# EAGLE board Main_Backup (EAGLE 7.2.0)
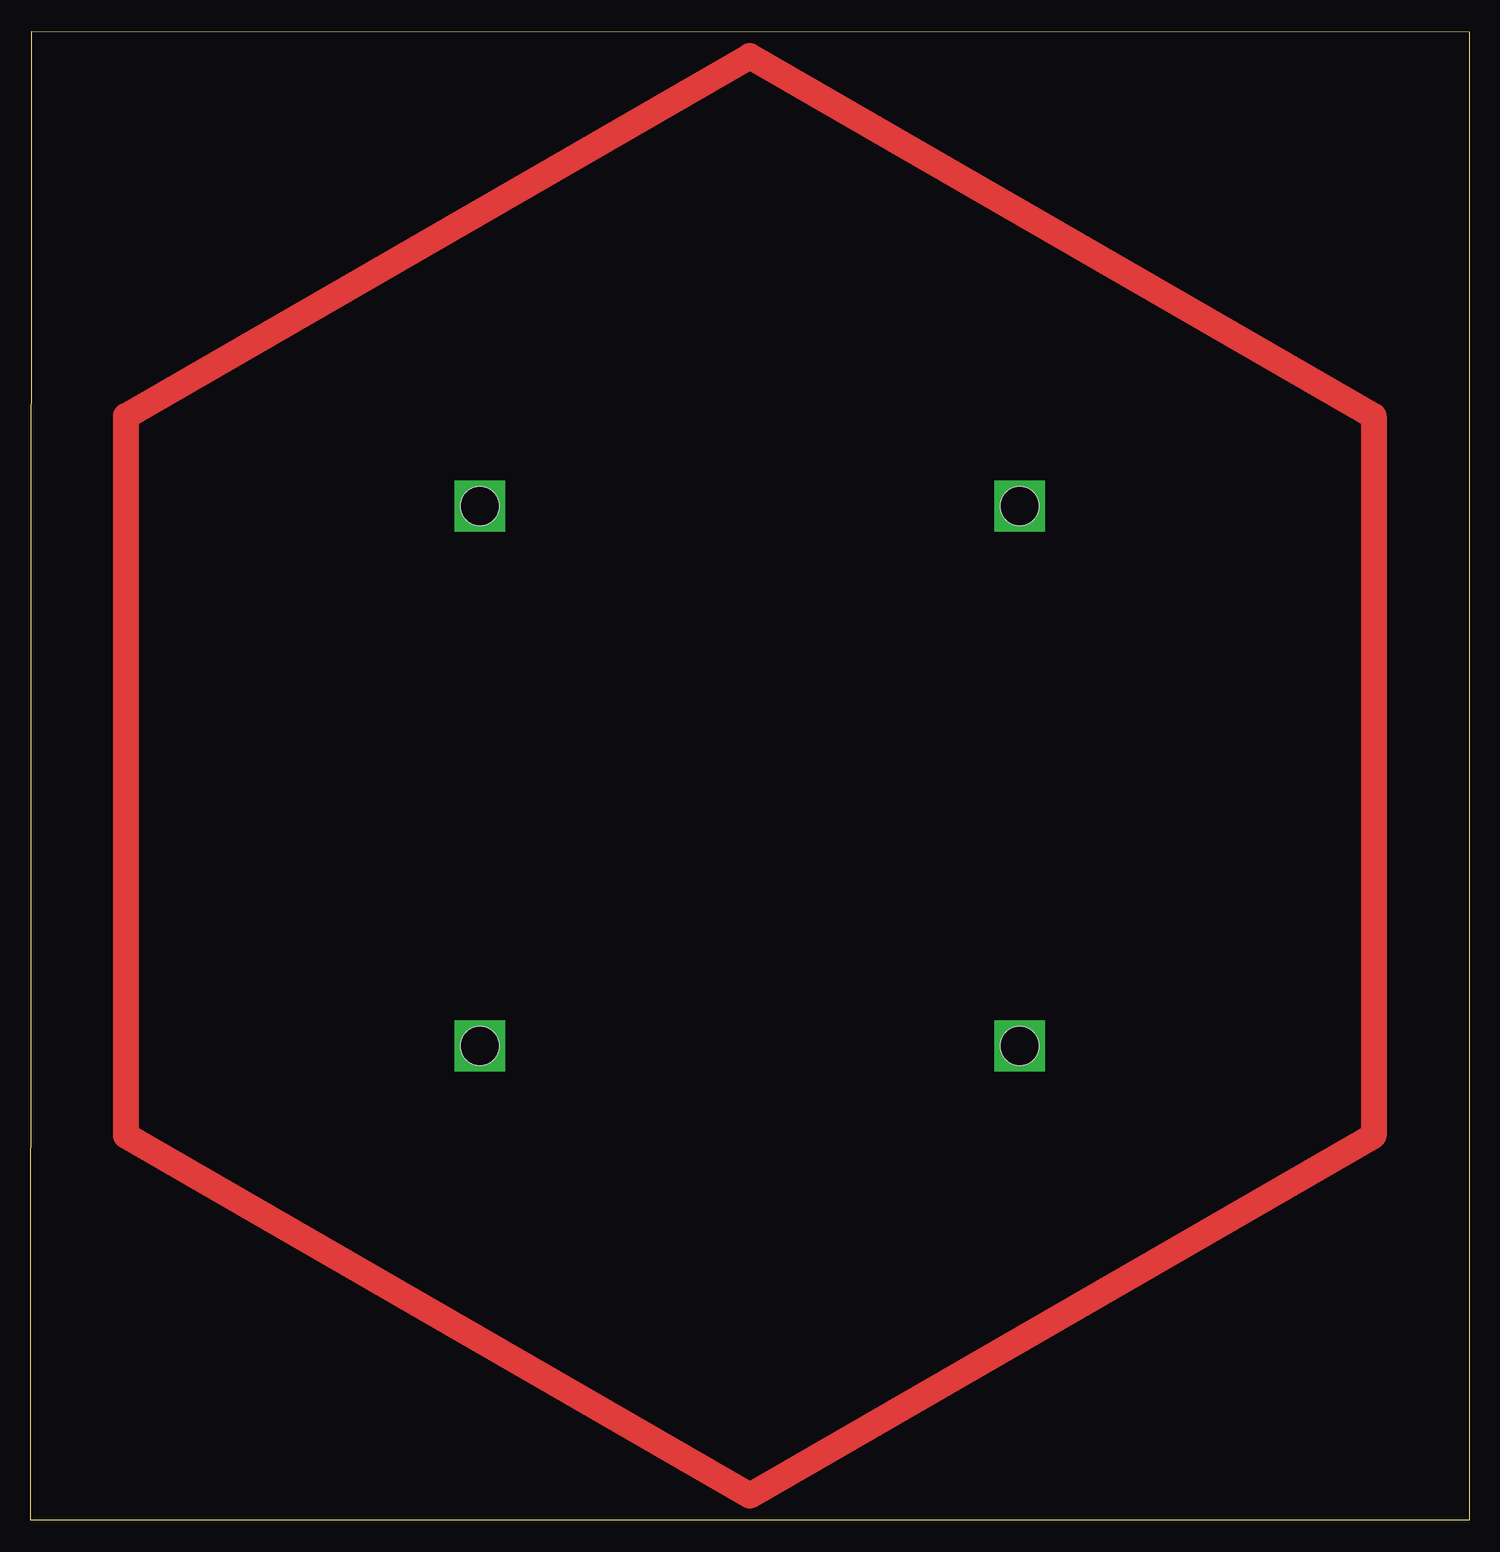
[diagram p0: board, top side]
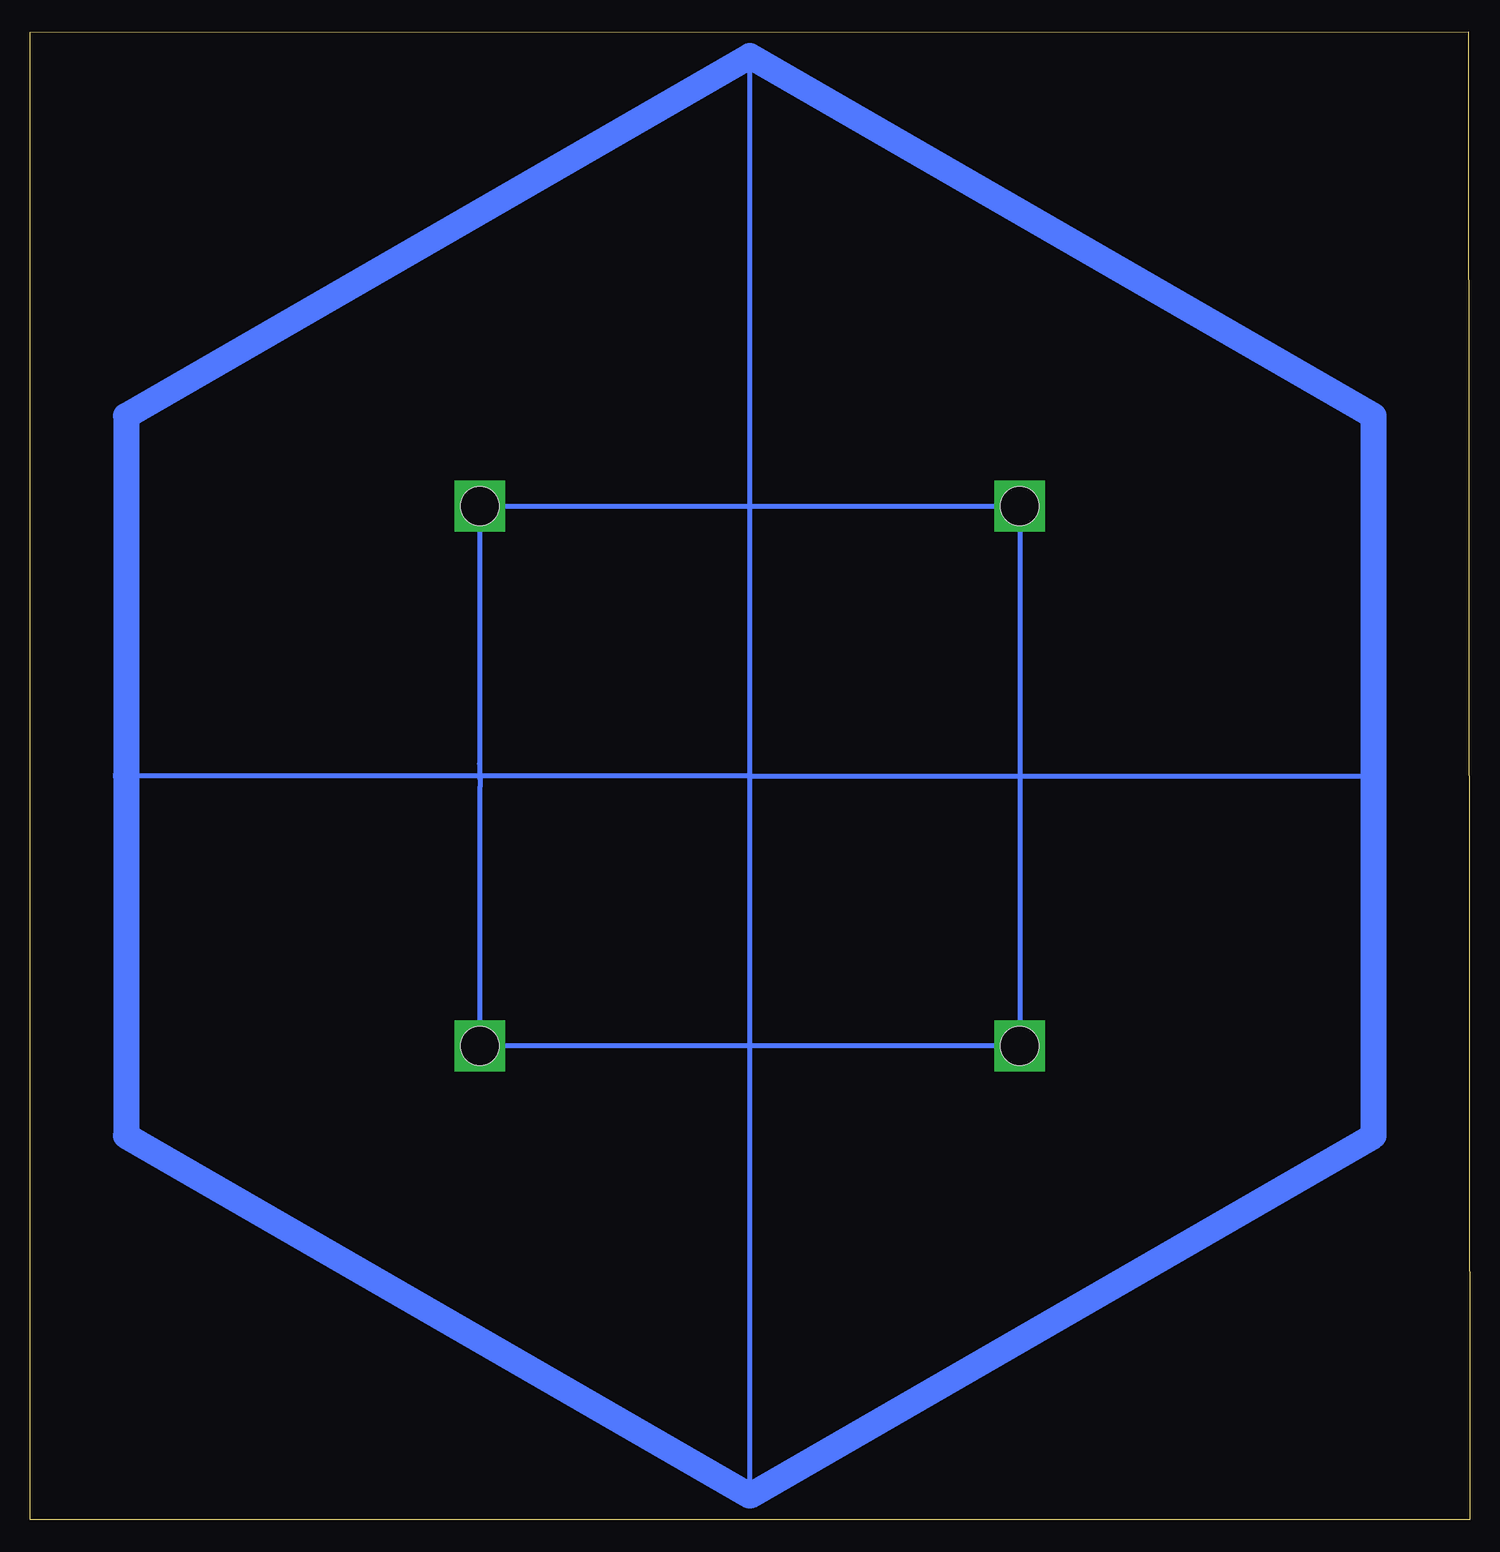
[diagram p1: board, bottom side, seen from below]

Size 120 x 124.03 mm. Coordinates in mm from the lower left corner, seen from the top.
Outline: 0,0 120,0 120,124 0.1,124.03 0,0
Copper layers (1*16): Top 0.035mm / dielectric 1.5mm / Bottom 0.035mm
Design rules "default": minimum track width 10mil, minimum drill 24mil, track to track 8mil, track to pad 8mil, pad to pad 8mil, via to via 8mil, smd to smd 8mil, copper to edge 40mil, drill to drill 8mil, minimum pad ring 10mil, minimum via ring 8mil, stop-mask expansion 4mil, vias tented up to drill 0mil, thermal gap 10mil
Holes 3.2 mm at 82.5,84.5 37.5,84.5 37.5,39.5 82.5,39.5

## Footprints (pad centres in the part's own frame; a part is rotated, then mirrored left to right if it is on the bottom)
1X02 = drill 1.016 long: 1 -1.27,0; 2 1.27,0
DO41-10 = drill 1.118: A 5.08,0; C -5.08,0
OSRAM-SIDELED = smd 4 x 4: A 0,2.5; C 0,-2.5
LED5MM = drill 0.813 octagon: A -1.27,0; K 1.27,0
TO220BH = drill 1.118 long: D 0,-6.35; G -2.54,-6.35; S 2.54,-6.35 | hole 3.302: 0,11.176
0309/12 = drill 0.813 octagon: 1 -6.35,0; 2 6.35,0
1X04 = drill 1.016 long: 1 -3.81,0; 2 -1.27,0; 3 1.27,0; 4 3.81,0
1X10 = drill 1.016 long: 1 -11.43,0; 2 -8.89,0; 3 -6.35,0; 4 -3.81,0; 5 -1.27,0; 6 1.27,0; 7 3.81,0; 8 6.35,0; 9 8.89,0; 10 11.43,0
TO92 = drill 0.813 octagon: 1 1.27,0; 2 0,1.905; 3 -1.27,0

## Placement (x,y rotation side)
12V_VCC_GND1  [1X02]  -101.34,48.45 0 top  (outside the outline)
D1  1N4004  [DO41-10]  -77.21,31.94 0 top  (outside the outline)
D2  1N4004  [DO41-10]  -89.91,31.94 0 top  (outside the outline)
LED1  1W  [OSRAM-SIDELED]  -91.18,9.08 0 top  (outside the outline)
LED2  1W  [OSRAM-SIDELED]  -100.07,9.08 0 top  (outside the outline)
LED3  1W  [OSRAM-SIDELED]  -108.96,9.08 0 top  (outside the outline)
LED4  1W  [OSRAM-SIDELED]  -65.78,33.21 0 top  (outside the outline)
LED5  [LED5MM]  -105.15,31.94 0 top  (outside the outline)
LED6  [LED5MM]  -117.85,31.94 0 top  (outside the outline)
LED7  [LED5MM]  -69.59,42.1 0 top  (outside the outline)
LED8  [LED5MM]  -82.29,42.1 0 top  (outside the outline)
Q1  IRFZ48Z  [TO220BH]  -68.32,12.89 0 top  (outside the outline)
Q2  IRFZ48Z  [TO220BH]  -81.02,12.89 0 top  (outside the outline)
R1  10Ohm5W  [0309/12]  -68.32,61.15 0 top  (outside the outline)
R2  3Ohm  [0309/12]  -83.56,61.15 0 top  (outside the outline)
R3  1Ohm  [0309/12]  -98.8,61.15 0 top  (outside the outline)
R4  1K  [0309/12]  -68.32,67.5 0 top  (outside the outline)
R5  14.3Ohm  [0309/12]  -83.56,67.5 0 top  (outside the outline)
R6  1K  [0309/12]  -98.8,67.5 0 top  (outside the outline)
R7  1K  [0309/12]  -68.32,73.85 0 top  (outside the outline)
R8  1K  [0309/12]  -83.56,73.85 0 top  (outside the outline)
R9  1K  [0309/12]  -98.8,73.85 0 top  (outside the outline)
R10  1K  [0309/12]  -68.32,80.2 0 top  (outside the outline)
R11  1K  [0309/12]  -83.56,80.2 0 top  (outside the outline)
R12  1K  [0309/12]  -98.8,80.2 0 top  (outside the outline)
SZ_ALTITUDINE  [1X04]  -115.31,48.45 0 top  (outside the outline)
SZ_DREAPTA  [1X04]  -69.59,54.8 0 top  (outside the outline)
SZ_F_A_CTRL  [1X10]  -98.8,40.83 0 top  (outside the outline)
SZ_FATA  [1X04]  -93.72,54.8 0 top  (outside the outline)
SZ_S_D_CTRL  [1X10]  -74.67,48.45 0 top  (outside the outline)
SZ_STANGA  [1X04]  -82.29,54.8 0 top  (outside the outline)
T1  BC547  [TO92]  -116.58,80.2 0 top  (outside the outline)
T2  BC547  [TO92]  -70.86,86.55 0 top  (outside the outline)
T6  BC547  [TO92]  -83.56,86.55 0 top  (outside the outline)
T9  BC547  [TO92]  -96.26,86.55 0 top  (outside the outline)
T10  BC547  [TO92]  -108.96,86.55 0 top  (outside the outline)
VCC_GND  [1X02]  -107.69,54.8 0 top  (outside the outline)

## Library data of the parts
12V_VCC_GND1 SZ_ALTITUDINE SZ_DREAPTA SZ_F_A_CTRL SZ_FATA SZ_S_D_CTRL SZ_STANGA VCC_GND = pinhead
D1 D2 = diode
LED1-LED8 = led
Q1 Q2 = transistor-power
R1-R12 = rcl
T1 T2 T6 T9 T10 = transistor

## Nets
COM_ALIM_SZ_A_F: R8.1
COM_ALIM_SZ_S_D: R9.1
COM_LED_ATER: R7.1
COM_LED_SEMNAL: R6.1
DATE_SZ_A_F: SZ_F_A_CTRL.8
DATE_SZ_S_D: SZ_S_D_CTRL.8
GND: D1.A D2.A Q1.S Q2.S R3.2 SZ_ALTITUDINE.4 SZ_DREAPTA.4 SZ_F_A_CTRL.3 SZ_F_A_CTRL.4 SZ_FATA.4 SZ_S_D_CTRL.3 SZ_S_D_CTRL.4 SZ_STANGA.4 T6.1
N$1: SZ_F_A_CTRL.7 SZ_FATA.2
N$2: D1.C VCC_GND.2
N$5: SZ_F_A_CTRL.10 SZ_FATA.3
N$6: SZ_ALTITUDINE.2 SZ_F_A_CTRL.6
N$7: SZ_ALTITUDINE.3 SZ_F_A_CTRL.9
N$8: SZ_DREAPTA.2 SZ_S_D_CTRL.7
N$9: SZ_DREAPTA.3 SZ_S_D_CTRL.10
N$10: SZ_S_D_CTRL.6 SZ_STANGA.2
N$11: SZ_S_D_CTRL.9 SZ_STANGA.3
N$12: SZ_ALTITUDINE.1 SZ_F_A_CTRL.2 SZ_FATA.1 T9.1
N$13: SZ_DREAPTA.1 SZ_S_D_CTRL.2 SZ_STANGA.1 T10.1
N$14: LED1.C LED2.C LED3.C LED4.C Q2.D
N$15: LED1.A LED2.A LED3.A LED4.A R1.1 R12.2
N$16: Q2.G T1.1
N$17: R1.2 R2.1 R3.1
N$18: 12V_VCC_GND1.2 D2.C
N$19: LED5.K LED6.K LED7.K LED8.K T6.3
N$20: LED5.A LED6.A LED7.A LED8.A R4.2
N$21: Q1.D R5.2 R11.2
N$22: R6.2 T6.2
N$23: R7.2 T1.2
N$24: R8.2 T9.2
N$25: R9.2 T10.2
N$26: R10.2 T2.2
N$27: R12.1 T1.3
N$28: R11.1 T2.3
N$29: Q1.G T2.1
PROIECTOR: R10.1
VCC: R4.1 T9.3 T10.3 VCC_GND.1
VEE: 12V_VCC_GND1.1 R2.2 R5.1

## Tracks (layer width: path | path; a pad name or v marks a point on that pad's centre or on a via)
GND  (13 unrouted)
N$1  (1 unrouted)
N$2  (1 unrouted)
N$3
  Bottom 0.406: 82.5,61.99 82.5,62.92
N$5  (1 unrouted)
N$6  (1 unrouted)
N$7  (1 unrouted)
N$8  (1 unrouted)
N$9  (1 unrouted)
N$10  (1 unrouted)
N$11  (1 unrouted)
N$12  (3 unrouted)
N$13  (3 unrouted)
N$14  (4 unrouted)
N$15  (5 unrouted)
N$16  (1 unrouted)
N$17  (2 unrouted)
N$18  (1 unrouted)
N$19  (4 unrouted)
N$20  (4 unrouted)
N$21  (2 unrouted)
N$22  (1 unrouted)
N$23  (1 unrouted)
N$24  (1 unrouted)
N$25  (1 unrouted)
N$26  (1 unrouted)
N$27  (1 unrouted)
N$28  (1 unrouted)
N$29  (1 unrouted)
N$31
  Top 2.184: 60,122 112,92 112,32 60,2 8,32 8,92 60,122
N$32  (via drill 3.2)
  Bottom 0.406: 82.53,63.02 82.5,63.02 v82.5,84.5 60,84.5 | 60,2 60,62 | 60,62 60,84.5 | 60,84.5 60,122 | 60,62 37.5,62 | 37.5,62 9,62 | 60,62 112,62 | 60,84.5 v37.5,84.5 37.5,62.02 | 37.5,62 v37.5,39.5 v82.5,39.5 82.5,61.08 82.5,61.78 82.5,61.97
  Bottom 2.184: 60,122 112,92 112,62 112,32 60,2 8,32 8,92 60,122
VCC  (3 unrouted)
VEE  (2 unrouted)